# Altium PCB No.3 跳线板.PcbDoc
Units mm, origin at the board's own origin, x right, y up, seen from the top; angles counter-clockwise.
Board outline 48 x 24 mm, 2 copper layers (Top Layer, Bottom Layer); 5 components, 16 nets, 46 pads, 9 vias.
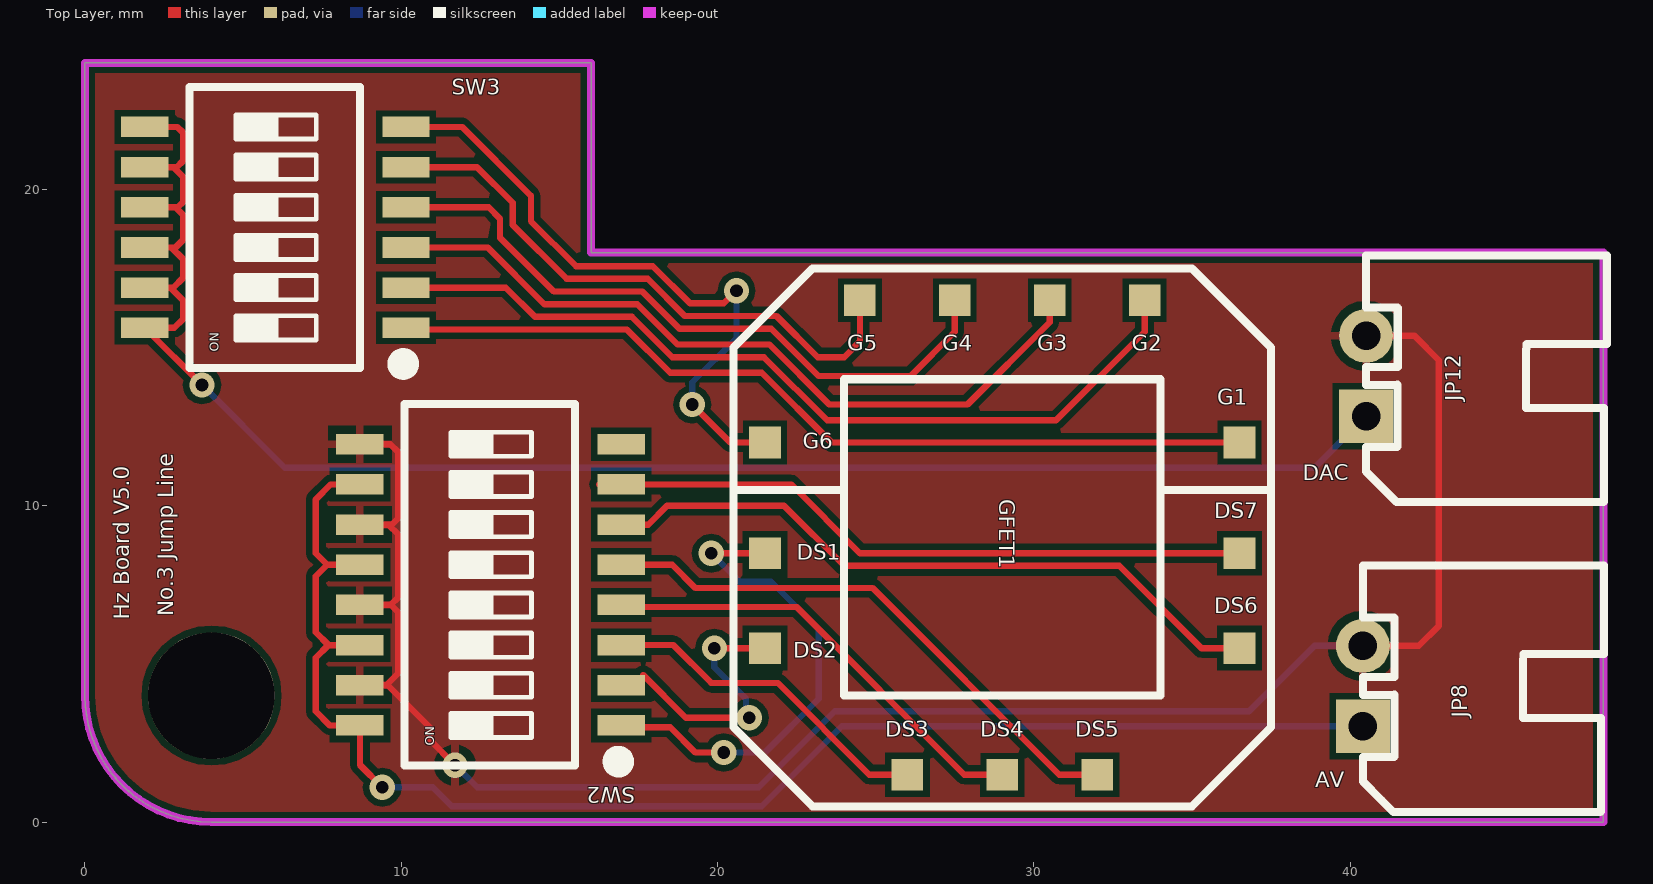
[diagram p0: Top Layer view]
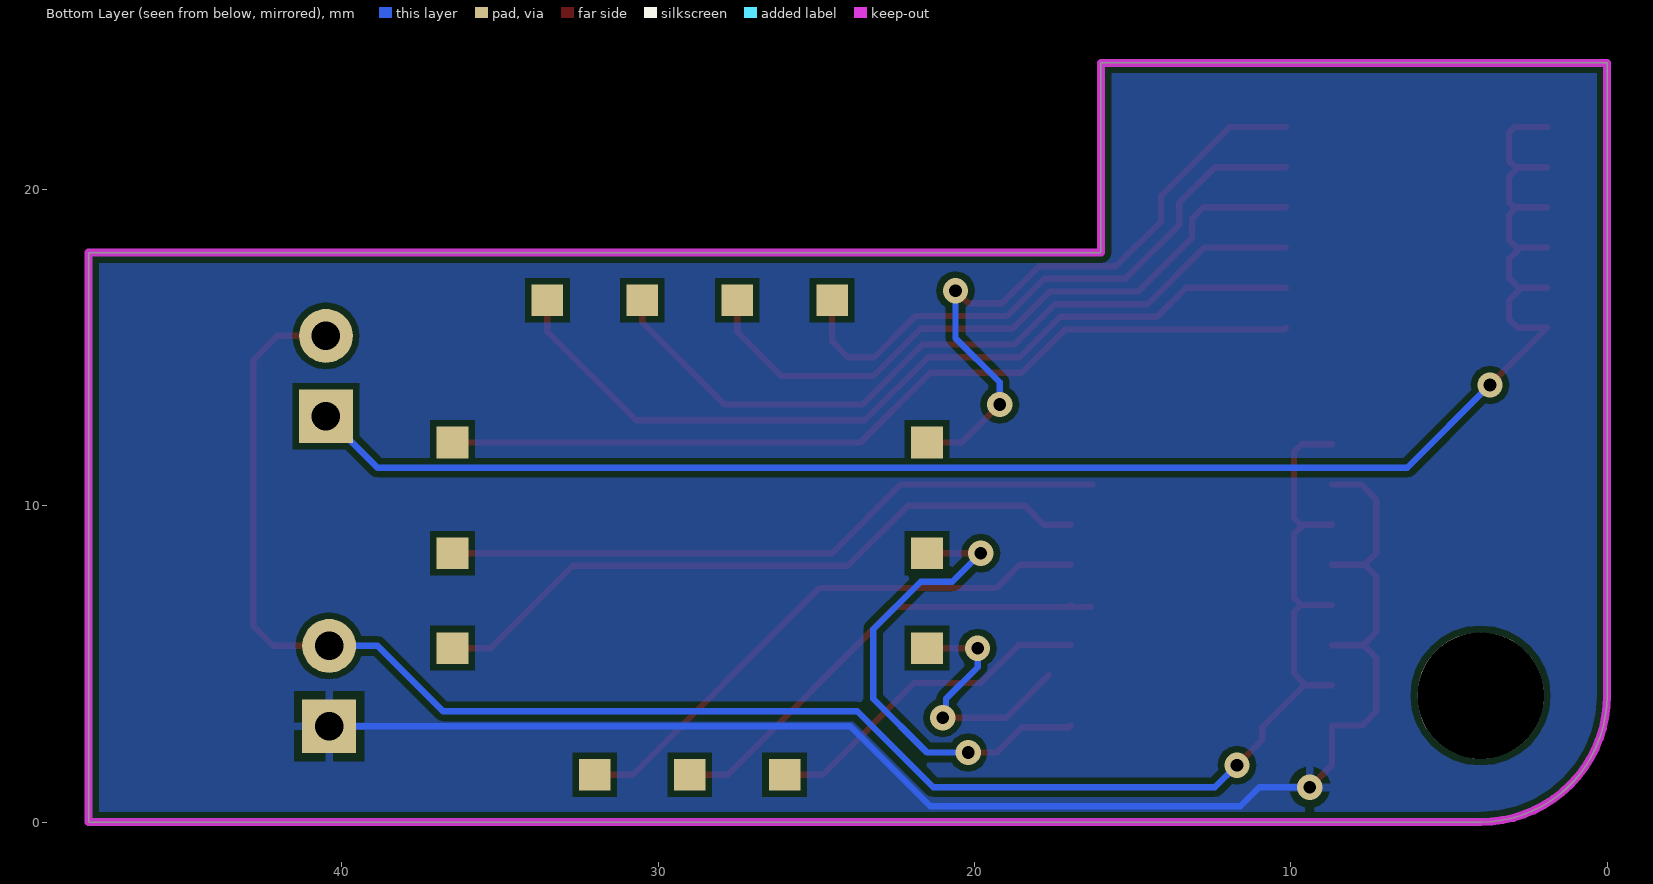
[diagram p1: Bottom Layer view, seen from below]
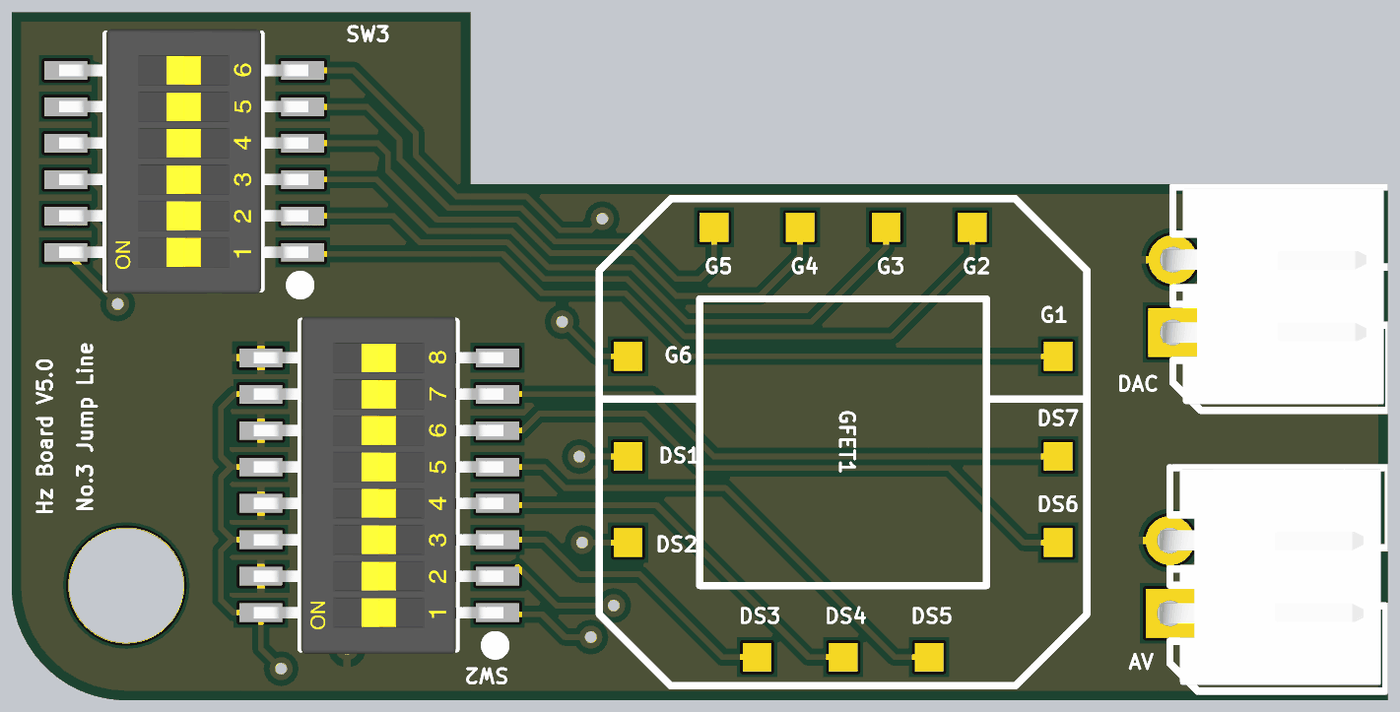
[diagram p2: 3D render of the assembled board from above, using the file's embedded part models]

## Layer stack, top to bottom
Top Layer: signal copper 0.0356
Dielectric: dielectric 0.32, FR-4, Dk 4.8
Bottom Layer: signal copper 0.0356

## Board outline
4,0 cw(c4,4) 0,4 0,24 16,24 16,18 48,18 48,0

## Design rules (kind name [scope] priority, off if disabled: settings)
Clearance [All] p1: gap=0.2
PolygonConnect [All] p1: connectstyle=Relief reliefconductorwidth=0.254 reliefentries=4 polygonreliefangle="90 Angle" airgapwidth=0.254
RoutingVias [All] p1: holewidth=0.4 width=0.8 viastyle="Through Hole" minholewidth=0.4 minwidth=0.8 maxholewidth=0.4 maxwidth=0.8
SolderMaskExpansion [All] p1: expansion=0.102
Width [All] p1: maxlimit=0.2 minlimit=0.2 preferedwidth=0.2
28 further rules are at their usual default settings.

## Components (designator, comment, footprint, x,y, rotation, side; value= is the part's Value field where it differs from the comment)
GFET1 "graphene FET" "graphene FET" 29,9 r270 top
JP8 "HDR-1X2" XH2.54-WI-2P 40.4,4.3 r90 top
JP12 "HDR-1X2" XH2.54-WI-2P 40.5,14.1 r90 top
SW2 "CSW-8P" "CSW1.27 SMD-8P" 12.8,7.5 r90 top
SW3 "CSW-6P" "CSW1.27 SMD-6P" 6,18.8 r90 top

## Footprints (in the part's own frame and the unit in brackets; to place one, negate y for a bottom-side part, rotate by r counter-clockwise, add the part's x,y. Pads: shape width x height; smd on the part's side, far side on the other; paste and mask are expansions set on the pad)
"CSW1.27 SMD-6P" [mm] "长：9.22mm，宽：5.4mm，高：2.3mm"
  rect 0.65x1.5 smd: 1(-3.175,-4.15) 2(-1.905,-4.15) 3(-0.635,-4.15) 4(0.635,-4.15) 5(1.905,-4.15) 6(3.175,-4.15) 7(3.175,4.105) 8(1.905,4.105) 9(0.635,4.105) 10(-0.635,4.105) 11(-1.905,4.105) 12(-3.175,4.105)
  silkscreen extent -4.57,-4.31 4.44,2.7, body extent -4.61,-4.35 4.61,4.35, height 2.35
"CSW1.27 SMD-8P" [mm] "长：11.76mm，宽：5.4mm，高：2.3mm"
  rect 0.65x1.5 smd: 1(-4.445,-4.15) 2(-3.175,-4.15) 3(-1.905,-4.15) 4(-0.635,-4.15) 5(0.635,-4.15) 6(1.905,-4.15) 7(3.175,-4.15) 8(4.445,-4.15) 9(4.445,4.105) 10(3.175,4.105) 11(1.905,4.105) 12(0.635,4.105) 13(-0.635,4.105) 14(-1.905,4.105) 15(-3.175,4.105) 16(-4.445,4.105)
  silkscreen extent -5.84,-4.31 5.71,2.7, body extent -5.88,-4.35 5.88,4.35, height 2.35
"graphene FET" [mm]
  rect 1x1 all layers, no hole: 1(0.5,-7.5) 2(3.5,-7.5) 3(7.5,-3) 4(7.5,0) 5(7.5,3) 6(3.5,7.5) 7(0.5,7.5) 8(-3,7.5) 9(-7.5,4.5) 10(-7.5,1.5) 11(-7.5,-1.5) 12(-7.5,-4.5) 13(-3,-7.5)
  silkscreen extent -8.5,-8.5 8.5,8.5
XH2.54-WI-2P [mm] "接插件，2P"
  rect 1.7x1.7 hole 0.9: 1(-1.27,0)
  round 1.7 hole 0.9: 2(1.27,0)
  silkscreen extent -3.99,-7.62 3.81,0, body extent -3.77,-7.35 3.77,0.35, height 5.73

## Part data
JP8 JP12: library part "Header 2", "2P接插件"
SW2: "8路编码开关"
SW3: "6路编码开关"

## Free pads (board coordinates)
  round 4 hole 4: 0(4,4)

## Via types
v1: diameter 0.8, hole 0.4, Top Layer to Bottom Layer, tented both sides, 9 vias

## Nets (pads, with @x,y where several pads share a name; then routed paths per layer and width w, separated by ;. In a path a pad name is that pad's centre, name@x,y a point inside that pad or via, vN(x,y) a via of type N, cw(c..) or ccw(c..) an arc to the next point about the centre after c; other vN are vias at no path point)
AIN: JP8.2 JP12.2 SW2.9 SW2.11 SW2.13 SW2.15 | length 60
  Top Layer w0.2: SW2.15 9.525,4.325 ; SW2.13 9.665,6.865 ; SW2.11 9.595,9.405 ; SW2.9 9.655,11.945 9.9,11.7 9.9,9.6 9.705,9.405 9.595,9.405 ; v1(11.7,1.8) 10.9,2.6 10.9,3 9.575,4.325 9.525,4.325 ; JP8.2 42.17,5.57 42.8,6.2 42.8,14.6 42.03,15.37 JP12.2 ; 9.525,4.325 9.9,4.7 9.9,6.63 9.665,6.865 ; 9.595,9.405 9.9,9.1 9.9,7.1 9.665,6.865
  Bottom Layer w0.2: v1(11.7,1.8) 12.4,1.1 21.3,1.1 23.7,3.5 36.8,3.5 38.87,5.57 JP8.2
AV: JP8.1 SW2.10 SW2.12 SW2.14 SW2.16 | length 47.2
  Top Layer w0.2: 7.695,5.595 SW2.14 ; 7.835,8.135 7.665,8.135 ; SW2.12 7.665,8.135 ; SW2.10 7.775,10.675 7.3,10.2 7.3,8.5 7.665,8.135 ; v1(9.4,1.1) 8.695,1.805 SW2.16 7.745,3.055 7.3,3.5 7.3,5.2 7.7,5.6 7.3,6 7.3,7.77 7.665,8.135
  Bottom Layer w0.2: v1(9.4,1.1) 11,1.1 11.6,0.5 21.4,0.5 23.93,3.03 JP8.1
DAC: JP12.1 SW3.7 SW3.8 SW3.9 SW3.10 SW3.11 SW3.12 | length 54.5
  Top Layer w0.2: SW3.11 2.705,16.895 ; SW3.10 2.735,18.165 ; SW3.9 2.865,19.435 ; SW3.8 2.905,20.705 3.1,20.9 3.1,21.8 2.925,21.975 SW3.7 ; 2.8,20.7 3.1,20.4 3.1,19.6 2.935,19.435 2.865,19.435 ; v1@3.7,13.8 v1(3.7,13.82) SW3.12 2.825,15.625 3.1,15.9 3.1,16.5 2.705,16.895 ; 2.705,16.895 2.795,16.895 3.1,17.2 3.1,17.8 2.735,18.165 ; 2.735,18.165 2.865,18.165 3.1,18.4 3.1,19.2 2.865,19.435
  Bottom Layer w0.2: v1(3.7,13.82) 6.32,11.2 38.87,11.2 JP12.1
DS1: GFET1.1 SW2.1 | length 15.7
  Top Layer w0.2: SW2.1 17.005,3 18.5,3 19.3,2.2 v1(20.2,2.2) ; v1(19.8,8.5) GFET1.1 ; GFET1.1@21.8,8.5 GFET1.1@21.9,8.4
  Bottom Layer w0.2: v1(19.8,8.5) 20.7,7.6 21.7,7.6 23.2,6.1 23.2,3.9 21.5,2.2 v1(20.2,2.2)
DS2: GFET1.2 SW2.2 | length 8.4
  Top Layer w0.2: SW2.2@17.65,4.65 19,3.3 v1(21,3.3) ; v1(19.9,5.5) GFET1.2
  Bottom Layer w0.2: v1(19.9,5.5) 19.9,4.9 20.9,3.9 20.9,3.2 v1(21,3.3)
DS3: GFET1.3 SW2.3 | length 10.8
  Top Layer w0.2: SW2.3 16.955,5.6 18.6,5.6 19.8,4.4 21.9,4.4 24.8,1.5 GFET1.3
DS4: GFET1.4 SW2.4 | length 15
  Top Layer w0.2: SW2.4@16.315,6.8 22.5,6.8 27.8,1.5 GFET1.4 ; SW2.4 SW2.4@17.015,6.8
DS5: GFET1.5 SW2.5 | length 17.8
  Top Layer w0.2: SW2.5 18.565,8.135 19.3,7.4 24.9,7.4 30.8,1.5 GFET1.5
DS6: GFET1.6 SW2.6 | length 21.7
  Top Layer w0.2: SW2.6 17.805,9.405 18.4,10 22.1,10 24,8.1 32.7,8.1 35.3,5.5 GFET1.6
DS7: GFET1.7 SW2.7 | length 21.2
  Top Layer w0.2: SW2.7@16.25,10.675 22.325,10.675 24.5,8.5 GFET1.7
G1: GFET1.8 SW3.1 | length 27.9
  Top Layer w0.2: SW3.1 10.202,15.573 17.127,15.573 18.5,14.2 21.4,14.2 23.6,12 GFET1.8
G2: GFET1.9 SW3.2 | length 27.2
  Top Layer w0.2: SW3.2 13.305,16.895 14.227,15.973 17.293,15.973 18.566,14.7 21.466,14.7 23.466,12.7 30.7,12.7 33.5,15.5 GFET1.9
G3: GFET1.10 SW3.3 | length 24.2
  Top Layer w0.2: SW3.3 12.735,18.165 14.527,16.373 17.458,16.373 18.731,15.1 21.631,15.1 23.531,13.2 27.9,13.2 30.5,15.8 GFET1.10
G4: GFET1.11 SW3.4 | length 21.5
  Top Layer w0.2: SW3.4 12.765,19.435 13.124,19.076 13.124,18.476 14.827,16.773 17.624,16.773 18.797,15.6 21.697,15.6 23.197,14.1 26.1,14.1 27.5,15.5 GFET1.11
G5: GFET1.12 SW3.5 | length 18.9
  Top Layer w0.2: SW3.5 12.395,20.705 13.524,19.576 13.524,18.876 15.227,17.173 17.79,17.173 18.963,16 21.863,16 23.163,14.7 24,14.7 24.5,15.2 24.5,16.2 GFET1.12@24.2,16.5
G6: GFET1.13 SW3.6 | length 20.4
  Top Layer w0.2: SW3.6 11.925,21.975 14.1,19.8 14.1,19 15.527,17.573 17.955,17.573 19.128,16.4 20.2,16.4 v1(20.6,16.8) ; v1(19.2,13.2) 20.4,12 GFET1.13
  Bottom Layer w0.2: v1(19.2,13.2) 19.2,13.9 20.6,15.3 v1(20.6,16.8)
pads on no net: SW2.8

## Polygon pours and split planes (outlines as drawn)
AIN on Top Layer "Top Layer-AIN" (solid, pour order 2): 48,18 48,0 0,0 0,24 16,24 16,18 48,18
AV on Bottom Layer "Bottom_AV" (solid, pour order 4): 48,18 48,0 0,0 0,24 16,24 16,18

## Keep-outs
Keep-Out Layer:
  the board outline again, w0.254

## Silkscreen, mask and mechanical layers (free items; w line width, h text height)
Top Overlay:
  text "G5" at 24.1,14.9 h0.5
  text "G4" at 27.1,14.9 h0.5
  text "G3" at 30.1,14.9 h0.5
  text "G2" at 33.1,14.9 h0.5
  text "G1" at 35.8,13.2 h0.5
  text "G6" at 22.7,11.8 h0.5
  text "DAC" at 38.5,10.8 h0.5
  text "DS7" at 35.7,9.6 h0.5
  text "DS1" at 22.5,8.3 h0.5
  text "DS6" at 35.7,6.6 h0.5
  text "No.3 Jump Line" at 2.8,6.5 h0.5 r90
  text "Hz Board V5.0" at 1.4,6.4 h0.5 r90
  text "DS2" at 22.4,5.2 h0.5
  text "DS3" at 25.3,2.7 h0.5
  text "DS4" at 28.3,2.7 h0.5
  text "DS5" at 31.3,2.7 h0.5
  text "AV" at 38.9,1.1 h0.5
Drill Drawing:
  text ".LEGEND" at 49.48,2.48 h1.52
  text "Drill Drawing." at 49.48,-0.06 h1.52

## Text inside footprints (layer, text, board x,y; h text height)
SW2: Top Overlay "ON" at 11.149,2.42 h0.5 r90
SW3: Top Overlay "ON" at 4.349,14.863 h0.5 r90